# Altium PCB controller_V1.0.PcbDoc (part 6 of 8)
Units mm, origin at the board's own origin, x right, y up, seen from the top; angles counter-clockwise.
Board outline 284.13 x 175.13 mm, 4 copper layers (Top Layer, GND, VCC, Bottom Layer); 496 components, 415 nets, 1682 pads, 750 vias.
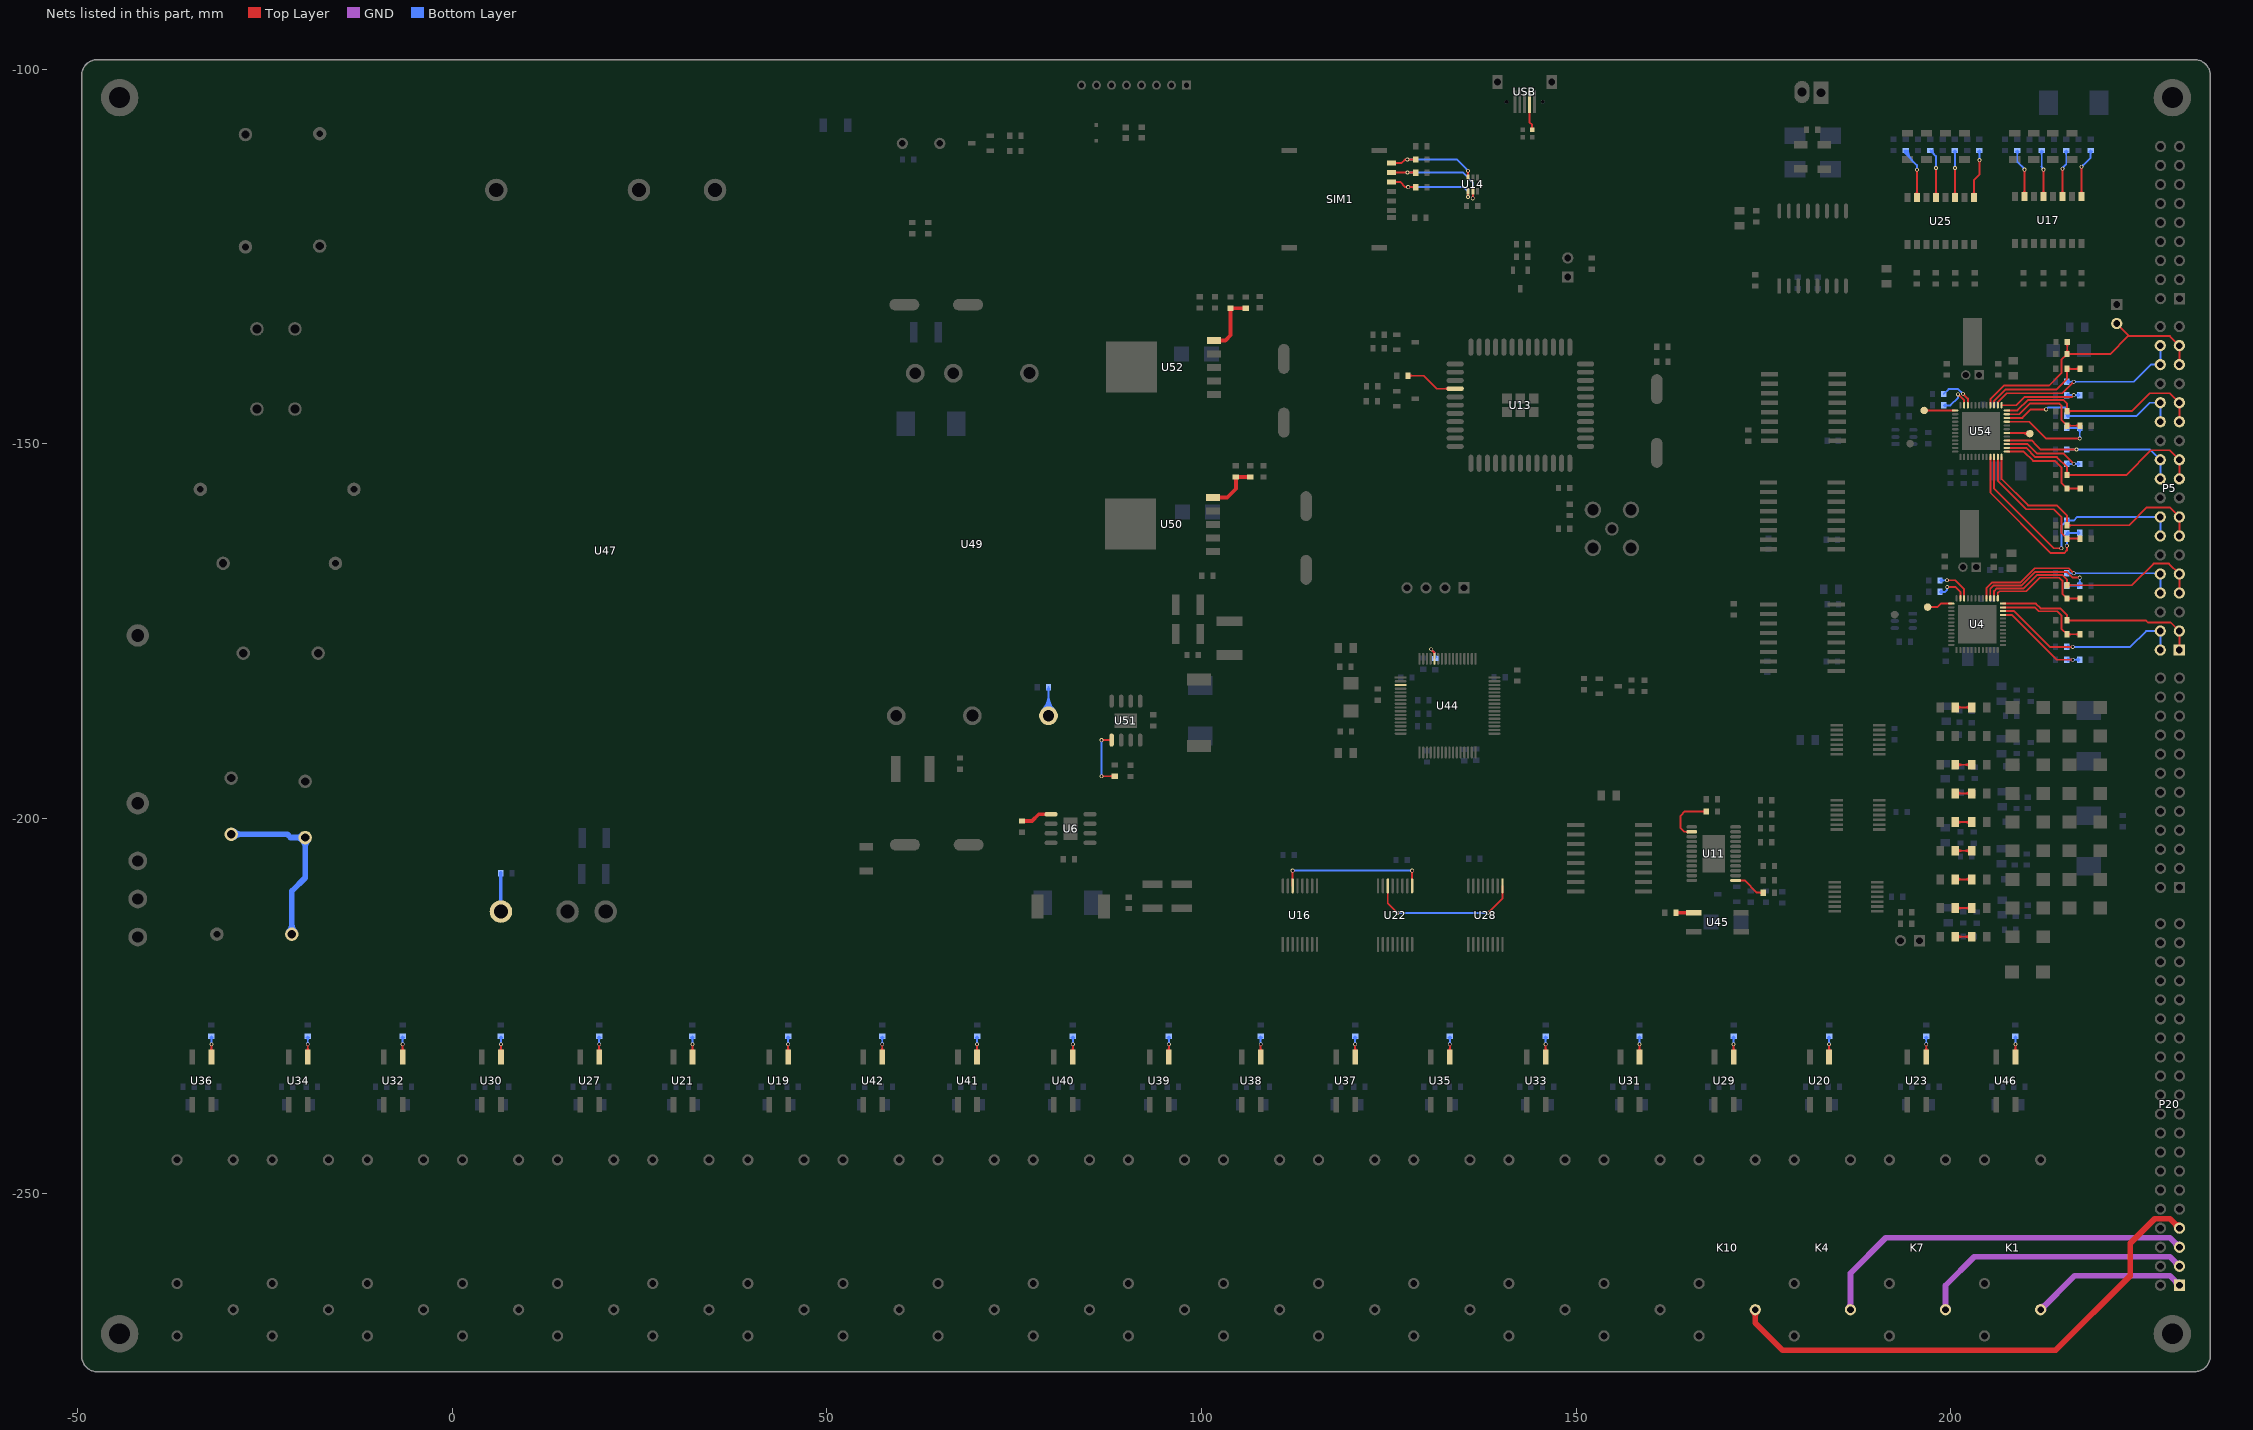
[diagram p8: the nets of this part, all layers, seen from the top]

## Via types
v1: diameter 0.508, hole 0.305, Top Layer to Bottom Layer, tented both sides, 596 vias
v2: diameter 1.016, hole 0.635, Top Layer to Bottom Layer, tented both sides, 65 vias
v3: diameter 0.6, hole 0.3, Top Layer to Bottom Layer, 50 vias
v4: diameter 0.762, hole 0.508, Top Layer to Bottom Layer, tented both sides, 29 vias
v5: diameter 2.032, hole 1.524, Top Layer to Bottom Layer, tented both sides, 4 vias
v6: diameter 3.048, hole 2.032, Top Layer to Bottom Layer, tented both sides, 3 vias
v7: diameter 1.5, hole 1, Top Layer to Bottom Layer, 2 vias
v8: diameter 2.54, hole 1.778, Top Layer to Bottom Layer, tented both sides, 1 vias

## Nets (pads, with @x,y where several pads share a name; then routed paths per layer and width w, separated by ;. In a path a pad name is that pad's centre, name@x,y a point inside that pad or via, vN(x,y) a via of type N, cw(c..) or ccw(c..) an arc to the next point about the centre after c; other vN are vias at no path point) (continued)
NetR10_1: R10.1 USB.2 | length 4.6
  Top Layer w0.254: USB.2@143.785,-104.326 143.785,-107.056 144.145,-107.417 R10.1@144.145,-108.093 ; R10.1@144.023,-107.971 ccw(c143.727,-107.675) 144.145,-107.675 ccw(c144.563,-107.675) R10.1@144.267,-107.971
NetR11_1: R11.1 R12.2 | length 5
  Top Layer w0.254: R12.2@200.625,-192.826 R11.1@202.816,-192.826 ; R12.2@200.889,-193.09 cw(c201.526,-193.727) 201.526,-192.826 cw(c201.526,-191.926) R12.2@200.889,-192.562 ; R11.1@202.553,-193.09 ccw(c201.916,-193.727) 201.916,-192.826 ccw(c201.916,-191.926) R11.1@202.553,-192.562
NetR13_1: R13.1 R14.2 | length 5
  Top Layer w0.254: R14.2@200.625,-196.652 R13.1@202.816,-196.652 ; R14.2@200.889,-196.916 cw(c201.526,-197.553) 201.526,-196.652 cw(c201.526,-195.752) R14.2@200.889,-196.388 ; R13.1@202.553,-196.916 ccw(c201.916,-197.553) 201.916,-196.652 ccw(c201.916,-195.752) R13.1@202.553,-196.388
NetR17_1: R17.1 R18.2 | length 5
  Top Layer w0.254: R18.2@200.625,-200.478 R17.1@202.816,-200.478 ; R18.2@200.889,-200.742 cw(c201.526,-201.378) 201.526,-200.478 cw(c201.526,-199.577) R18.2@200.889,-200.214 ; R17.1@202.553,-200.742 ccw(c201.916,-201.378) 201.916,-200.478 ccw(c201.916,-199.577) R17.1@202.553,-200.214
NetR20_2: R20.2 U4.10 | length 6.7
  Top Layer w0.254: v1(199.517,-168.199) 200.59,-168.199 201.795,-169.404 U4.10@201.795,-170.616 ; v1@199.607,-168.289 cw(c199.824,-168.505) 199.824,-168.199 cw(c199.824,-167.892) v1@199.607,-168.109
  Bottom Layer w0.254: R20.2@198.593,-168.199 v1(199.517,-168.199) ; R20.2@198.726,-168.382 cw(c199.168,-168.824) 199.168,-168.199 ; R20.2@198.726,-168.067 ccw(c199.045,-167.747) 199.045,-168.199 ; v1@199.427,-168.289 ccw(c199.21,-168.505) 199.21,-168.199 ccw(c199.21,-167.892) v1@199.427,-168.109
NetR22_1: R22.1 U44.60 | length 5.1
  Top Layer w0.254: v1@130.658,-177.546 cw(c130.658,-177.853) 130.874,-177.636 cw(c131.091,-177.419) v1@130.785,-177.419 ; v1(130.658,-177.419) 131.091,-177.852 U44.60@131.091,-178.678 ; 130.927,-177.689 cw(c130.588,-178.028) U44.60@131.068,-178.028
  Bottom Layer w0.254: v1@130.658,-177.546 cw(c130.658,-177.853) 130.874,-177.636 cw(c131.091,-177.419) v1@130.785,-177.419 ; v1(130.658,-177.419) 131.191,-177.952 R22.1@131.191,-178.638 ; R22.1@131.033,-178.481 ccw(c130.653,-178.1) 131.191,-178.1 ccw(c131.729,-178.1) R22.1@131.349,-178.481
NetR27_1: R27.1 R28.2 | length 5
  Top Layer w0.254: R28.2@200.625,-204.304 R27.1@202.816,-204.304 ; R28.2@200.889,-204.568 cw(c201.526,-205.204) 201.526,-204.304 cw(c201.526,-203.403) R28.2@200.889,-204.04 ; R27.1@202.553,-204.568 ccw(c201.916,-205.204) 201.916,-204.304 ccw(c201.916,-203.403) R27.1@202.553,-204.04
NetR31_1: R31.1 U47.4 | length 5.1
  Bottom Layer w0.508: R31.1@6.474,-207.289 6.474,-212.413 U47.4@6.485,-212.423
NetR32_1: R32.1 R33.2 | length 5
  Top Layer w0.254: R33.2@200.625,-208.13 R32.1@202.816,-208.13 ; R33.2@200.889,-208.393 cw(c201.526,-209.03) 201.526,-208.13 cw(c201.526,-207.229) R33.2@200.889,-207.866 ; R32.1@202.553,-208.393 ccw(c201.916,-209.03) 201.916,-208.13 ccw(c201.916,-207.229) R32.1@202.553,-207.866
NetR34_1: R34.1 R35.2 | length 5
  Top Layer w0.254: R35.2@200.625,-211.956 R34.1@202.816,-211.956 ; R35.2@200.889,-212.219 cw(c201.526,-212.856) 201.526,-211.956 cw(c201.526,-211.055) R35.2@200.889,-211.692 ; R34.1@202.553,-212.219 ccw(c201.916,-212.856) 201.916,-211.956 ccw(c201.916,-211.055) R34.1@202.553,-211.692
NetR36_1: R36.1 R38.2 | length 5
  Top Layer w0.254: R38.2@200.625,-215.781 R36.1@202.816,-215.781 ; R38.2@200.889,-216.045 cw(c201.526,-216.682) 201.526,-215.781 cw(c201.526,-214.881) R38.2@200.889,-215.518 ; R36.1@202.553,-216.045 ccw(c201.916,-216.682) 201.916,-215.781 ccw(c201.916,-214.881) R36.1@202.553,-215.518
NetR71_1: R71.1 U11.13 | length 5.6
  Top Layer w0.254: U11.13@171.299,-208.274 172.51,-208.274 174.142,-209.906 R71.1@174.978,-209.906 ; U11.13@171.868,-208.343 cw(c172.036,-208.51) 172.036,-208.274 cw(c172.036,-208.037) U11.13@171.868,-208.204 ; R71.1@174.82,-210.063 ccw(c174.44,-210.444) 174.44,-209.906 ccw(c174.44,-209.367) R71.1@174.82,-209.748
NetR73_2: R73.2 U4.11 | length 6.1
  Top Layer w0.254: v1(199.542,-169.113) 200.66,-169.113 201.295,-169.748 U4.11@201.295,-170.616 ; v1@199.632,-169.203 cw(c199.849,-169.42) 199.849,-169.113 cw(c199.849,-168.807) v1@199.632,-169.023
  Bottom Layer w0.254: R73.2@198.568,-169.748 199.263,-169.748 199.542,-169.469 v1(199.542,-169.113) ; R73.2@198.726,-169.906 cw(c199.106,-170.287) 199.106,-169.748 cw(c199.106,-169.21) R73.2@198.726,-169.591 ; v1@199.453,-169.203 cw(c199.236,-169.42) 199.542,-169.42 cw(c199.849,-169.42) v1@199.632,-169.203
NetR75_2: R75.2 U54.11 | length 6.5
  Top Layer w0.254: v1@200.99,-143.51 cw(c200.99,-143.817) 201.207,-143.6 cw(c201.424,-143.383) v1@201.117,-143.383 ; v1(200.99,-143.383) 201.803,-144.196 U54.11@201.803,-144.835
  Bottom Layer w0.254: R75.2@199.076,-144.856 199.974,-144.856 200.99,-143.84 v1(200.99,-143.383) v1@200.914,-143.383 ; R75.2@199.234,-145.014 cw(c199.614,-145.395) 199.614,-144.856 cw(c199.614,-144.318) R75.2@199.234,-144.699 ; v1@200.9,-143.473 cw(c200.684,-143.69) 200.99,-143.69 cw(c201.297,-143.69) v1@201.08,-143.473
NetR80_1: R80.1 R89.2 | length 5
  Top Layer w0.254: R89.2@200.625,-185.174 R80.1@202.816,-185.174 ; R89.2@200.889,-185.438 cw(c201.526,-186.075) 201.526,-185.174 cw(c201.526,-184.274) R89.2@200.889,-184.911 ; R80.1@202.553,-185.438 ccw(c201.916,-186.075) 201.916,-185.174 ccw(c201.916,-184.274) R80.1@202.553,-184.911
NetR81_1: R81.1 U25.1 | length 9.3
  Top Layer w0.254: U25.1@202.928,-116.701 ccw(c202.462,-116.235) 203.121,-116.235 ccw(c203.78,-116.235) U25.1@203.314,-116.701 ; U25.1@203.121,-117.094 203.121,-114.76 203.86,-114.021 v1(203.86,-112.116) ; v1@203.771,-112.205 cw(c203.554,-112.422) 203.86,-112.422 cw(c204.167,-112.422) v1@203.95,-112.205
  Bottom Layer w0.254: R81.1@203.677,-110.979 cw(c203.297,-111.36) 203.835,-111.36 cw(c204.373,-111.36) R81.1@203.993,-110.979 ; 203.835,-111.748 ccw(c204.228,-111.748) v1@203.95,-112.026 ; R81.1@203.835,-110.822 203.835,-112.09 v1(203.86,-112.116)
NetR86_1: R86.1 U25.3 | length 9.1
  Top Layer w0.254: U25.3@200.388,-116.701 ccw(c199.922,-116.235) 200.581,-116.235 ccw(c201.24,-116.235) U25.3@200.774,-116.701 ; v1@200.491,-113.244 cw(c200.275,-113.461) 200.581,-113.461 cw(c200.888,-113.461) v1@200.671,-113.244 ; U25.3@200.581,-117.094 v1(200.581,-113.154)
  Bottom Layer w0.254: R86.1@200.404,-110.979 cw(c200.024,-111.36) 200.562,-111.36 cw(c201.1,-111.36) R86.1@200.72,-110.979 ; v1@200.491,-113.065 ccw(c200.321,-112.894) 200.562,-112.894 ; 200.562,-112.801 ccw(c200.934,-112.801) v1@200.671,-113.065 ; R86.1@200.562,-110.822 200.562,-113.135 v1(200.581,-113.154)
NetR92_1: R92.1 U25.5 | length 9.4
  Top Layer w0.254: U25.5@197.848,-116.701 ccw(c197.382,-116.235) 198.041,-116.235 ccw(c198.7,-116.235) U25.5@198.234,-116.701 ; v1@197.951,-113.244 cw(c197.735,-113.461) 198.041,-113.461 cw(c198.348,-113.461) v1@198.131,-113.244 ; U25.5@198.041,-117.094 v1(198.041,-113.154)
  Bottom Layer w0.254: R92.1@197.289,-110.822 198.041,-111.574 v1(198.041,-113.154) ; R92.1@197.364,-111.045 cw(c197.364,-111.402) R92.1@197.617,-111.149 ; R92.1@197.587,-110.822 ccw(c198.306,-110.822) 197.798,-111.33 ; v1@197.951,-113.065 ccw(c197.735,-112.848) 198.041,-112.848 ccw(c198.348,-112.848) v1@198.131,-113.065
NetR96_1: R96.1 U25.7 | length 13
  Top Layer w0.254: U25.7@195.308,-116.701 ccw(c194.842,-116.235) 195.501,-116.235 ccw(c196.16,-116.235) U25.7@195.694,-116.701 ; v1@195.411,-113.498 cw(c195.195,-113.715) 195.501,-113.715 cw(c195.808,-113.715) v1@195.591,-113.498 ; U25.7@195.501,-117.094 v1(195.501,-113.408)
  Bottom Layer w0.254: R96.1@193.806,-110.822 ccw(c194.426,-110.822) 193.988,-111.26 ; R96.1@193.876,-110.995 cw(c193.639,-111.288) 194.016,-111.288 ; R96.1@193.933,-110.979 cw(c193.734,-111.179) 194.016,-111.179 ; 194.016,-111.294 cw(c194.317,-111.294) R96.1@194.187,-111.023 ; R96.1@194.016,-110.822 194.016,-111.288 ; R96.1@194.06,-110.822 ccw(c195.293,-110.822) 194.421,-111.693 ; R96.1@194.156,-110.995 ccw(c194.393,-111.288) 194.016,-111.288 ; R96.1@194.314,-110.822 ccw(c196.16,-110.822) 194.855,-112.127 ; v1@195.411,-113.319 ccw(c195.195,-113.102) 195.501,-113.102 ccw(c195.808,-113.102) v1@195.591,-113.319 ; v1(195.501,-113.408) 195.501,-112.773 194.016,-111.288
NetR105_1: R105.1 U11.2 | length 8.2
  Top Layer w0.254: U11.2@164.88,-201.843 ccw(c164.712,-202.01) 164.712,-201.774 ccw(c164.712,-201.537) U11.2@164.88,-201.704 ; U11.2@165.449,-201.774 164.436,-201.774 163.957,-201.295 163.957,-199.644 164.541,-199.06 R105.1@167.382,-199.06 ; R105.1@167.224,-199.217 ccw(c166.844,-199.598) 166.844,-199.06 ccw(c166.844,-198.521) R105.1@167.224,-198.902
NetR106_1: R106.1 U45.1 | length 2.4
  Top Layer w0.508: R106.1@163.347,-212.573 U45.1@165.707,-212.573
NetR107_1: R107.1 U46.1 | length 5.5
  Top Layer w0.254: U46.1@208.469,-231.037 ccw(c208.035,-230.603) 208.649,-230.603 ccw(c209.262,-230.603) U46.1@208.828,-231.037 ; v1@208.559,-230.214 cw(c208.342,-230.431) 208.649,-230.431 cw(c208.955,-230.431) v1@208.738,-230.214 ; U46.1@208.649,-231.851 v1(208.649,-230.124)
  Bottom Layer w0.254: R107.1@208.491,-229.24 cw(c208.11,-229.621) 208.649,-229.621 cw(c209.187,-229.621) R107.1@208.806,-229.24 ; v1@208.559,-230.034 ccw(c208.342,-229.817) 208.649,-229.817 ccw(c208.955,-229.817) v1@208.738,-230.034 ; v1(208.649,-230.124) R107.1@208.649,-229.083
NetR108_1: R108.1 U17.1 | length 9.5
  Top Layer w0.254: U17.1@217.279,-116.574 ccw(c216.813,-116.108) 217.472,-116.108 ccw(c218.131,-116.108) U17.1@217.665,-116.574 ; v1@217.382,-113.094 cw(c217.166,-113.311) 217.472,-113.311 cw(c217.779,-113.311) v1@217.562,-113.094 ; U17.1@217.472,-116.967 v1(217.472,-113.005)
  Bottom Layer w0.254: v1(217.472,-113.005) 218.694,-111.783 R108.1@218.694,-110.822 ; v1@217.472,-112.878 ccw(c217.472,-112.571) 217.689,-112.788 ccw(c217.906,-113.005) v1@217.599,-113.005 ; R108.1@218.536,-110.979 cw(c218.156,-111.36) 218.694,-111.36 cw(c219.232,-111.36) R108.1@218.852,-110.979
NetR111_1: R111.1 SIM1.2 U14.4 | length 17.3
  Top Layer w0.254: SIM1.2@125.346,-115.026 126.507,-115.026 127.203,-115.722 v1(127.584,-115.722) R111.1@128.596,-115.722 ; SIM1.2@125.776,-115.166 cw(c126.114,-115.504) 126.114,-115.026 cw(c126.114,-114.548) SIM1.2@125.776,-114.886 ; v1@127.494,-115.812 ccw(c127.278,-116.029) 127.278,-115.722 ccw(c127.278,-115.416) v1@127.494,-115.633 ; v1@127.674,-115.812 cw(c127.891,-116.029) 127.891,-115.722 cw(c127.891,-115.416) v1@127.674,-115.633 ; R111.1@128.439,-115.88 ccw(c128.058,-116.261) 128.058,-115.722 ccw(c128.058,-115.184) R111.1@128.439,-115.565 ; v1@135.478,-116.946 ccw(c135.261,-116.729) 135.568,-116.729 ccw(c135.874,-116.729) v1@135.657,-116.946 ; v1(135.568,-117.035) U14.4@135.568,-116.292
  Bottom Layer w0.254: v1(127.584,-115.722) 135.026,-115.722 135.568,-116.264 v1(135.568,-117.035) ; v1@127.674,-115.812 cw(c127.891,-116.029) 127.891,-115.722 cw(c127.891,-115.416) v1@127.674,-115.633 ; v1@135.478,-116.946 ccw(c135.261,-116.729) 135.568,-116.729 ccw(c135.874,-116.729) v1@135.657,-116.946
NetR113_1: R113.1 U17.3 | length 9.1
  Top Layer w0.254: U17.3@214.739,-116.574 ccw(c214.273,-116.108) 214.932,-116.108 ccw(c215.591,-116.108) U17.3@215.125,-116.574 ; v1@214.842,-113.348 cw(c214.626,-113.565) 214.932,-113.565 cw(c215.239,-113.565) v1@215.022,-113.348 ; U17.3@214.932,-116.967 v1(214.932,-113.259)
  Bottom Layer w0.254: v1@214.932,-113.132 215.428,-112.636 R113.1@215.428,-110.822 ; v1@215.059,-113.259 cw(c215.672,-113.259) 215.239,-112.825 ; R113.1@215.271,-110.979 cw(c214.89,-111.36) 215.428,-111.36 cw(c215.967,-111.36) R113.1@215.586,-110.979
NetR115_1: R115.1 U17.5 | length 8.9
  Top Layer w0.254: U17.5@212.199,-116.574 ccw(c211.733,-116.108) 212.392,-116.108 ccw(c213.051,-116.108) U17.5@212.585,-116.574 ; v1@212.302,-113.475 cw(c212.086,-113.692) 212.392,-113.692 cw(c212.699,-113.692) v1@212.482,-113.475 ; U17.5@212.392,-116.967 v1(212.392,-113.386)
  Bottom Layer w0.254: R115.1@212.005,-110.979 cw(c211.624,-111.36) 212.163,-111.36 cw(c212.701,-111.36) R115.1@212.32,-110.979 ; 212.099,-112.965 cw(c211.697,-113.367) v1@212.265,-113.382 ; R115.1@212.163,-110.822 212.163,-113.029 v1@212.392,-113.259
NetR117_1: R117.1 U17.7 | length 9.3
  Top Layer w0.254: U17.7@209.659,-116.574 ccw(c209.193,-116.108) 209.852,-116.108 ccw(c210.511,-116.108) U17.7@210.045,-116.574 ; v1@209.762,-113.475 cw(c209.546,-113.692) 209.852,-113.692 cw(c210.159,-113.692) v1@209.942,-113.475 ; U17.7@209.852,-116.967 v1(209.852,-113.386)
  Bottom Layer w0.254: R117.1@208.739,-110.979 cw(c208.358,-111.36) 208.897,-111.36 cw(c209.435,-111.36) R117.1@209.055,-110.979 ; R117.1@208.897,-110.822 208.897,-112.303 v1@209.852,-113.259 ; 209.546,-112.952 cw(c209.112,-113.386) v1@209.725,-113.386
NetR120_1: R120.1 SIM1.3 U14.3 | length 17.3
  Top Layer w0.254: SIM1.3@125.346,-112.486 126.731,-112.486 127.178,-112.039 ; SIM1.3@125.776,-112.626 cw(c126.114,-112.964) 126.114,-112.486 cw(c126.114,-112.008) SIM1.3@125.776,-112.346 ; 127.025,-112.192 cw(c127.248,-112.415) v1@127.415,-112.147 ; v1@127.392,-112.129 ccw(c127.178,-112.342) 127.178,-112.039 ; v1@127.392,-111.95 cw(c127.178,-111.737) 127.178,-112.039 ; v1@127.572,-112.129 cw(c127.789,-112.346) 127.789,-112.039 cw(c127.789,-111.733) v1@127.572,-111.95 ; R120.1@128.439,-112.197 ccw(c128.058,-112.578) 128.058,-112.039 ccw(c128.058,-111.501) R120.1@128.439,-111.882 ; R120.1@128.596,-112.039 v1(127.483,-112.039) 127.178,-112.039 ; v1@135.478,-113.62 cw(c135.261,-113.837) 135.568,-113.837 cw(c135.874,-113.837) v1@135.657,-113.62 ; U14.3@135.568,-114.442 v1(135.568,-113.53)
  Bottom Layer w0.254: v1(127.483,-112.039) 134.112,-112.039 v1@135.585,-113.513 ; v1@127.572,-112.129 cw(c127.789,-112.346) 127.789,-112.039 cw(c127.789,-111.733) v1@127.572,-111.95 ; 135.326,-113.253 cw(c135.049,-113.53) v1@135.441,-113.53
NetR121_1: R121.1 SIM1.7 U14.5 | length 19.5
  Top Layer w0.254: SIM1.7@125.346,-113.756 v1(127.508,-113.756) R121.1@128.535,-113.756 ; SIM1.7@125.776,-113.896 cw(c126.114,-114.234) 126.114,-113.756 cw(c126.114,-113.278) SIM1.7@125.776,-113.616 ; v1@127.418,-113.846 ccw(c127.201,-114.063) 127.201,-113.756 ccw(c127.201,-113.45) v1@127.418,-113.667 ; v1@127.598,-113.846 cw(c127.815,-114.063) 127.815,-113.756 cw(c127.815,-113.45) v1@127.598,-113.667 ; 128.024,-113.756 ccw(c128.024,-113.17) R121.1@128.439,-113.585 ; 128.092,-113.756 cw(c128.092,-114.247) R121.1@128.439,-113.9 ; v1@136.128,-117.134 ccw(c135.911,-116.917) 136.218,-116.917 ccw(c136.524,-116.917) v1@136.307,-117.134 ; v1(136.218,-117.224) U14.5@136.218,-116.292
  Bottom Layer w0.254: v1(127.508,-113.756) 134.178,-113.756 134.864,-113.756 136.218,-115.11 v1(136.218,-117.224) ; v1@127.598,-113.846 cw(c127.815,-114.063) 127.815,-113.756 cw(c127.815,-113.45) v1@127.598,-113.667 ; v1@136.128,-117.134 ccw(c135.911,-116.917) 136.218,-116.917 ccw(c136.524,-116.917) v1@136.307,-117.134
NetR124_1: R124.1 U19.1 | length 5.5
  Top Layer w0.254: U19.1@44.646,-231.037 ccw(c44.212,-230.603) 44.825,-230.603 ccw(c45.439,-230.603) U19.1@45.005,-231.037 ; v1@44.736,-230.214 cw(c44.519,-230.431) 44.825,-230.431 cw(c45.132,-230.431) v1@44.915,-230.214 ; U19.1@44.825,-231.851 v1(44.825,-230.124)
  Bottom Layer w0.254: R124.1@44.668,-229.24 cw(c44.287,-229.621) 44.825,-229.621 cw(c45.364,-229.621) R124.1@44.983,-229.24 ; v1@44.736,-230.034 ccw(c44.519,-229.817) 44.825,-229.817 ccw(c45.132,-229.817) v1@44.915,-230.034 ; v1(44.825,-230.124) R124.1@44.825,-229.083
NetR127_1: R127.1 U20.1 | length 5.5
  Top Layer w0.254: U20.1@183.599,-231.037 ccw(c183.166,-230.603) 183.779,-230.603 ccw(c184.392,-230.603) U20.1@183.958,-231.037 ; v1@183.689,-230.214 cw(c183.472,-230.431) 183.779,-230.431 cw(c184.085,-230.431) v1@183.869,-230.214 ; U20.1@183.779,-231.851 v1(183.779,-230.124)
  Bottom Layer w0.254: R127.1@183.621,-229.24 cw(c183.24,-229.621) 183.779,-229.621 cw(c184.317,-229.621) R127.1@183.936,-229.24 ; v1@183.689,-230.034 ccw(c183.472,-229.817) 183.779,-229.817 ccw(c184.085,-229.817) v1@183.869,-230.034 ; v1(183.779,-230.124) R127.1@183.779,-229.083
NetR128_1: R128.1 U21.1 | length 5.5
  Top Layer w0.254: U21.1@31.881,-231.037 ccw(c31.447,-230.603) 32.061,-230.603 ccw(c32.674,-230.603) U21.1@32.24,-231.037 ; v1@31.971,-230.214 cw(c31.754,-230.431) 32.061,-230.431 cw(c32.367,-230.431) v1@32.15,-230.214 ; U21.1@32.061,-231.851 v1(32.061,-230.124)
  Bottom Layer w0.254: R128.1@31.872,-229.24 cw(c31.416,-229.696) 32.061,-229.696 ; v1@31.971,-230.034 ccw(c31.754,-229.817) 32.061,-229.817 ccw(c32.367,-229.817) v1@32.15,-230.034 ; v1(32.061,-230.124) R128.1@32.061,-229.083 ; 32.061,-229.546 cw(c32.493,-229.546) R128.1@32.187,-229.24
NetR131_1: R131.1 U23.1 | length 5.5
  Top Layer w0.254: U23.1@196.566,-231.037 ccw(c196.132,-230.603) 196.745,-230.603 ccw(c197.359,-230.603) U23.1@196.925,-231.037 ; v1@196.656,-230.214 cw(c196.439,-230.431) 196.745,-230.431 cw(c197.052,-230.431) v1@196.835,-230.214 ; U23.1@196.745,-231.851 v1(196.745,-230.124)
  Bottom Layer w0.254: R131.1@196.588,-229.24 cw(c196.207,-229.621) 196.745,-229.621 cw(c197.284,-229.621) R131.1@196.903,-229.24 ; v1@196.656,-230.034 ccw(c196.439,-229.817) 196.745,-229.817 ccw(c197.052,-229.817) v1@196.835,-230.034 ; v1(196.745,-230.124) R131.1@196.745,-229.083
NetR132_1: R132.1 U27.1 | length 5.5
  Top Layer w0.254: U27.1@19.423,-231.037 ccw(c18.989,-230.603) 19.603,-230.603 ccw(c20.216,-230.603) U27.1@19.782,-231.037 ; v1@19.513,-230.214 cw(c19.296,-230.431) 19.603,-230.431 cw(c19.909,-230.431) v1@19.692,-230.214 ; U27.1@19.603,-231.851 v1(19.603,-230.124)
  Bottom Layer w0.254: R132.1@19.445,-229.24 cw(c19.064,-229.621) 19.603,-229.621 cw(c20.141,-229.621) R132.1@19.76,-229.24 ; v1@19.513,-230.034 ccw(c19.296,-229.817) 19.603,-229.817 ccw(c19.909,-229.817) v1@19.692,-230.034 ; v1(19.603,-230.124) R132.1@19.603,-229.083
NetR135_1: R135.1 U29.1 | length 5.5
  Top Layer w0.254: U29.1@170.852,-231.037 ccw(c170.418,-230.603) 171.031,-230.603 ccw(c171.644,-230.603) U29.1@171.211,-231.037 ; v1@170.941,-230.214 cw(c170.725,-230.431) 171.031,-230.431 cw(c171.338,-230.431) v1@171.121,-230.214 ; U29.1@171.031,-231.851 v1(171.031,-230.124)
  Bottom Layer w0.254: R135.1@170.874,-229.24 cw(c170.493,-229.621) 171.031,-229.621 cw(c171.57,-229.621) R135.1@171.189,-229.24 ; v1@170.941,-230.034 ccw(c170.725,-229.817) 171.031,-229.817 ccw(c171.338,-229.817) v1@171.121,-230.034 ; v1(171.031,-230.124) R135.1@171.031,-229.083
NetR136_1: R136.1 U30.1 | length 5.5
  Top Layer w0.254: U30.1@6.304,-231.037 ccw(c5.871,-230.603) 6.484,-230.603 ccw(c7.097,-230.603) U30.1@6.664,-231.037 ; v1@6.394,-230.214 cw(c6.177,-230.431) 6.484,-230.431 cw(c6.791,-230.431) v1@6.574,-230.214 ; U30.1@6.484,-231.851 v1(6.484,-230.124)
  Bottom Layer w0.254: R136.1@6.326,-229.24 cw(c5.946,-229.621) 6.484,-229.621 cw(c7.022,-229.621) R136.1@6.642,-229.24 ; v1@6.394,-230.034 ccw(c6.177,-229.817) 6.484,-229.817 ccw(c6.791,-229.817) v1@6.574,-230.034 ; v1(6.484,-230.124) R136.1@6.484,-229.083
NetR139_1: R139.1 U31.1 | length 5.5
  Top Layer w0.254: U31.1@158.29,-231.037 ccw(c157.856,-230.603) 158.47,-230.603 ccw(c159.083,-230.603) U31.1@158.649,-231.037 ; v1@158.38,-230.214 cw(c158.163,-230.431) 158.47,-230.431 cw(c158.776,-230.431) v1@158.559,-230.214 ; U31.1@158.47,-231.851 v1(158.47,-230.124)
  Bottom Layer w0.254: R139.1@158.312,-229.24 cw(c157.931,-229.621) 158.47,-229.621 cw(c159.008,-229.621) R139.1@158.627,-229.24 ; v1@158.38,-230.034 ccw(c158.163,-229.817) 158.47,-229.817 ccw(c158.776,-229.817) v1@158.559,-230.034 ; v1(158.47,-230.124) R139.1@158.47,-229.083
NetR140_1: R140.1 U32.1 | length 5.5
  Top Layer w0.254: U32.1@-6.812,-231.037 ccw(c-7.246,-230.603) -6.632,-230.603 ccw(c-6.019,-230.603) U32.1@-6.453,-231.037 ; v1@-6.722,-230.214 cw(c-6.939,-230.431) -6.632,-230.431 cw(c-6.326,-230.431) v1@-6.543,-230.214 ; U32.1@-6.632,-231.851 v1(-6.632,-230.124)
  Bottom Layer w0.254: R140.1@-6.79,-229.24 cw(c-7.171,-229.621) -6.632,-229.621 cw(c-6.094,-229.621) R140.1@-6.475,-229.24 ; v1@-6.722,-230.034 ccw(c-6.939,-229.817) -6.632,-229.817 ccw(c-6.326,-229.817) v1@-6.543,-230.034 ; v1(-6.632,-230.124) R140.1@-6.632,-229.083
NetR142_1: R142.1 U33.1 | length 5.5
  Top Layer w0.254: U33.1@145.761,-231.037 ccw(c145.327,-230.603) 145.941,-230.603 ccw(c146.554,-230.603) U33.1@146.12,-231.037 ; v1@145.851,-230.214 cw(c145.634,-230.431) 145.941,-230.431 cw(c146.247,-230.431) v1@146.03,-230.214 ; U33.1@145.941,-231.851 v1(145.941,-230.124)
  Bottom Layer w0.254: R142.1@145.783,-229.24 cw(c145.402,-229.621) 145.941,-229.621 cw(c146.479,-229.621) R142.1@146.098,-229.24 ; v1@145.851,-230.034 ccw(c145.634,-229.817) 145.941,-229.817 ccw(c146.247,-229.817) v1@146.03,-230.034 ; v1(145.941,-230.124) R142.1@145.941,-229.083
NetR144_1: R144.1 U34.1 | length 5.5
  Top Layer w0.254: U34.1@-19.475,-231.037 ccw(c-19.909,-230.603) -19.296,-230.603 ccw(c-18.682,-230.603) U34.1@-19.116,-231.037 ; v1@-19.385,-230.214 cw(c-19.602,-230.431) -19.296,-230.431 cw(c-18.989,-230.431) v1@-19.206,-230.214 ; U34.1@-19.296,-231.851 v1(-19.296,-230.124)
  Bottom Layer w0.254: R144.1@-19.453,-229.24 cw(c-19.834,-229.621) -19.296,-229.621 cw(c-18.757,-229.621) R144.1@-19.138,-229.24 ; v1@-19.385,-230.034 ccw(c-19.602,-229.817) -19.296,-229.817 ccw(c-18.989,-229.817) v1@-19.206,-230.034 ; v1(-19.296,-230.124) R144.1@-19.296,-229.083
NetR147_1: R147.1 U35.1 | length 5.5
  Top Layer w0.254: U35.1@132.968,-231.037 ccw(c132.534,-230.603) 133.147,-230.603 ccw(c133.76,-230.603) U35.1@133.327,-231.037 ; v1@133.057,-230.214 cw(c132.841,-230.431) 133.147,-230.431 cw(c133.454,-230.431) v1@133.237,-230.214 ; U35.1@133.147,-231.851 v1(133.147,-230.124)
  Bottom Layer w0.254: R147.1@132.989,-229.24 cw(c132.609,-229.621) 133.147,-229.621 cw(c133.686,-229.621) R147.1@133.305,-229.24 ; v1@133.057,-230.034 ccw(c132.841,-229.817) 133.147,-229.817 ccw(c133.454,-229.817) v1@133.237,-230.034 ; v1(133.147,-230.124) R147.1@133.147,-229.083
NetR148_1: R148.1 U36.1 | length 5.5
  Top Layer w0.254: U36.1@-32.339,-231.037 ccw(c-32.772,-230.603) -32.159,-230.603 ccw(c-31.546,-230.603) U36.1@-31.979,-231.037 ; v1@-32.249,-230.214 cw(c-32.466,-230.431) -32.159,-230.431 cw(c-31.852,-230.431) v1@-32.069,-230.214 ; U36.1@-32.159,-231.851 v1(-32.159,-230.124)
  Bottom Layer w0.254: R148.1@-32.317,-229.24 cw(c-32.697,-229.621) -32.159,-229.621 cw(c-31.621,-229.621) R148.1@-32.001,-229.24 ; v1@-32.249,-230.034 ccw(c-32.466,-229.817) -32.159,-229.817 ccw(c-31.852,-229.817) v1@-32.069,-230.034 ; v1(-32.159,-230.124) R148.1@-32.159,-229.083
NetR150_1: R150.1 U37.1 | length 5.5
  Top Layer w0.254: U37.1@120.332,-231.037 ccw(c119.898,-230.603) 120.511,-230.603 ccw(c121.125,-230.603) U37.1@120.691,-231.037 ; v1@120.422,-230.214 cw(c120.205,-230.431) 120.511,-230.431 cw(c120.818,-230.431) v1@120.601,-230.214 ; U37.1@120.511,-231.851 v1(120.511,-230.124)
  Bottom Layer w0.254: R150.1@120.354,-229.24 cw(c119.973,-229.621) 120.511,-229.621 cw(c121.05,-229.621) R150.1@120.669,-229.24 ; v1@120.422,-230.034 ccw(c120.205,-229.817) 120.511,-229.817 ccw(c120.818,-229.817) v1@120.601,-230.034 ; v1(120.511,-230.124) R150.1@120.511,-229.083
NetR152_1: R152.1 U38.1 | length 5.5
  Top Layer w0.254: U38.1@107.721,-231.037 ccw(c107.288,-230.603) 107.901,-230.603 ccw(c108.514,-230.603) U38.1@108.081,-231.037 ; v1@107.811,-230.214 cw(c107.594,-230.431) 107.901,-230.431 cw(c108.208,-230.431) v1@107.991,-230.214 ; U38.1@107.901,-231.851 v1(107.901,-230.124)
  Bottom Layer w0.254: R152.1@107.743,-229.24 cw(c107.363,-229.621) 107.901,-229.621 cw(c108.439,-229.621) R152.1@108.059,-229.24 ; v1@107.811,-230.034 ccw(c107.594,-229.817) 107.901,-229.817 ccw(c108.208,-229.817) v1@107.991,-230.034 ; v1(107.901,-230.124) R152.1@107.901,-229.083
NetR154_1: R154.1 U39.1 | length 5.5
  Top Layer w0.254: U39.1@95.466,-231.037 ccw(c95.033,-230.603) 95.646,-230.603 ccw(c96.259,-230.603) U39.1@95.826,-231.037 ; v1@95.556,-230.214 cw(c95.339,-230.431) 95.646,-230.431 cw(c95.953,-230.431) v1@95.736,-230.214 ; U39.1@95.646,-231.851 v1(95.646,-230.124)
  Bottom Layer w0.254: R154.1@95.488,-229.24 cw(c95.108,-229.621) 95.646,-229.621 cw(c96.184,-229.621) R154.1@95.804,-229.24 ; v1@95.556,-230.034 ccw(c95.339,-229.817) 95.646,-229.817 ccw(c95.953,-229.817) v1@95.736,-230.034 ; v1(95.646,-230.124) R154.1@95.646,-229.083
NetR156_1: R156.1 U40.1 | length 5.5
  Top Layer w0.254: U40.1@82.653,-231.037 ccw(c82.219,-230.603) 82.832,-230.603 ccw(c83.446,-230.603) U40.1@83.012,-231.037 ; v1@82.743,-230.214 cw(c82.526,-230.431) 82.832,-230.431 cw(c83.139,-230.431) v1@82.922,-230.214 ; U40.1@82.832,-231.851 v1(82.832,-230.124)
  Bottom Layer w0.254: R156.1@82.675,-229.24 cw(c82.294,-229.621) 82.832,-229.621 cw(c83.371,-229.621) R156.1@82.99,-229.24 ; v1@82.743,-230.034 ccw(c82.526,-229.817) 82.832,-229.817 ccw(c83.139,-229.817) v1@82.922,-230.034 ; v1(82.832,-230.124) R156.1@82.832,-229.083
NetR158_1: R158.1 U41.1 | length 5.5
  Top Layer w0.254: U41.1@69.865,-231.037 ccw(c69.431,-230.603) 70.044,-230.603 ccw(c70.657,-230.603) U41.1@70.224,-231.037 ; v1@69.954,-230.214 cw(c69.738,-230.431) 70.044,-230.431 cw(c70.351,-230.431) v1@70.134,-230.214 ; U41.1@70.044,-231.851 v1(70.044,-230.124)
  Bottom Layer w0.254: R158.1@69.887,-229.24 cw(c69.506,-229.621) 70.044,-229.621 cw(c70.583,-229.621) R158.1@70.202,-229.24 ; v1@69.954,-230.034 ccw(c69.738,-229.817) 70.044,-229.817 ccw(c70.351,-229.817) v1@70.134,-230.034 ; v1(70.044,-230.124) R158.1@70.044,-229.083
NetR160_1: R160.1 U42.1 | length 5.5
  Top Layer w0.254: U42.1@57.203,-231.037 ccw(c56.77,-230.603) 57.383,-230.603 ccw(c57.996,-230.603) U42.1@57.563,-231.037 ; v1@57.293,-230.214 cw(c57.076,-230.431) 57.383,-230.431 cw(c57.69,-230.431) v1@57.473,-230.214 ; U42.1@57.383,-231.851 v1(57.383,-230.124)
  Bottom Layer w0.254: R160.1@57.225,-229.24 cw(c56.845,-229.621) 57.383,-229.621 cw(c57.921,-229.621) R160.1@57.541,-229.24 ; v1@57.293,-230.034 ccw(c57.076,-229.817) 57.383,-229.817 ccw(c57.69,-229.817) v1@57.473,-230.034 ; v1(57.383,-230.124) R160.1@57.383,-229.083
NetR164_1: R164.1 U13.16 | length 8.6
  Top Layer w0.254: R164.1@127.582,-140.894 129.667,-140.894 131.404,-142.631 U13.16@133.868,-142.631 ; R164.1@127.739,-141.051 cw(c128.12,-141.432) 128.12,-140.894 cw(c128.12,-140.355) R164.1@127.739,-140.736 ; U13.16@132.903,-142.771 ccw(c132.565,-143.109) 132.565,-142.631 ccw(c132.565,-142.153) U13.16@132.903,-142.491
NetR173_1: R173.1 R176.2 R177.2 | length 31.6
  Bottom Layer w0.762: R173.1@-29.517,-202.108 -22.047,-202.108 -21.608,-202.547 R176.2@-19.637,-202.547 -19.637,-207.902 -21.422,-209.687 R177.2@-21.422,-215.443 ; R173.1@-29.15,-202.475 cw(c-28.264,-203.361) -28.264,-202.108 cw(c-28.264,-200.855) R173.1@-29.15,-201.741 ; R177.2@-21.789,-215.076 ccw(c-22.675,-214.19) -21.422,-214.19 ccw(c-20.169,-214.19) R177.2@-21.055,-215.076 ; R176.2@-20.004,-202.18 cw(c-20.89,-201.294) -20.89,-202.547 cw(c-20.89,-203.8) -20.004,-202.914 cw(c-20.89,-203.8) -19.637,-203.8 cw(c-18.384,-203.8) R176.2@-19.27,-202.914
NetR178_1: R178.1 U49.6 | length 14.5
  Bottom Layer w0.254: U49.6@78.782,-185.49 ccw(c76.864,-183.572) 79.576,-183.572 ccw(c82.287,-183.572) U49.6@80.37,-185.49 ; U49.6@78.961,-185.669 ccw(c77.478,-184.186) 79.576,-184.186 ccw(c81.674,-184.186) U49.6@80.19,-185.669 ; U49.6@79.141,-185.849 ccw(c78.091,-184.799) 79.576,-184.799 ccw(c81.06,-184.799) U49.6@80.01,-185.849 ; R178.1@79.418,-182.706 cw(c79.037,-183.087) 79.576,-183.087 cw(c80.114,-183.087) R178.1@79.733,-182.706 ; U49.6@79.576,-186.284 R178.1@79.576,-182.474
NetR179_1: R179.1 U6.5 | length 4.2
  Top Layer w0.508: R179.1@76.045,-200.33 77.391,-200.33 78.28,-199.441 U6.5@79.922,-199.441
NetR180_2: R180.2 R181.2 U50.5 | length 7.9
  Top Layer w0.508: U50.5@101.521,-157.138 103.438,-157.138 104.595,-155.981 R181.2@104.595,-154.407 R180.2@106.5,-154.407 ; U50.5@102.127,-157.294 cw(c102.505,-157.672) 102.505,-157.138 cw(c102.505,-156.604) U50.5@102.127,-156.982
NetR182_1: R182.1 U51.5 | length 11.4
  Top Layer w0.254: v1(86.668,-189.538) U51.5@88.008,-189.538 ; v1@86.672,-194.361 R182.1@88.434,-194.361 ; v1@86.758,-194.447 cw(c86.967,-194.656) 86.967,-194.361 ; v1@86.758,-194.268 ccw(c86.983,-194.043) 86.983,-194.361 ; v1@86.758,-189.628 cw(c86.975,-189.845) 86.975,-189.538 cw(c86.975,-189.232) v1@86.758,-189.448 ; U51.5@87.886,-189.661 ccw(c87.591,-189.956) 87.591,-189.538 ccw(c87.591,-189.121) U51.5@87.886,-189.416 ; R182.1@88.202,-194.518 ccw(c87.821,-194.899) 87.821,-194.361 ccw(c87.821,-193.822) R182.1@88.202,-194.203
  Bottom Layer w0.254: v1@86.578,-194.268 ccw(c86.362,-194.051) 86.668,-194.051 ccw(c86.975,-194.051) v1@86.758,-194.268 ; v1@86.578,-189.628 cw(c86.362,-189.845) 86.668,-189.845 cw(c86.975,-189.845) v1@86.758,-189.628 ; v1(86.668,-194.357) v1(86.668,-189.538)
NetR185_2: R185.2 R186.2 U52.5 | length 9
  Top Layer w0.508: U52.5@101.648,-136.183 103.184,-136.183 103.867,-135.5 R186.2@103.867,-131.878 105.89,-131.878 R185.2@105.915,-131.904 ; U52.5@102.254,-136.339 cw(c102.632,-136.717) 102.632,-136.183 cw(c102.632,-135.649) U52.5@102.254,-136.027
NetR190_2: R190.2 U54.10 | length 5.9
  Top Layer w0.254: v1@201.651,-143.434 cw(c201.651,-143.74) 201.867,-143.524 cw(c202.084,-143.307) v1@201.778,-143.307 ; v1(201.651,-143.307) 202.303,-143.959 U54.10@202.303,-144.835
  Bottom Layer w0.254: R190.2@199.076,-143.332 199.736,-142.672 201.016,-142.672 v1(201.651,-143.307) ; v1@201.524,-143.307 ccw(c201.217,-143.307) 201.434,-143.09 ccw(c201.651,-142.873) v1@201.651,-143.18
NetTP3_1: TP3.1 U54.42 | length 4.5
  Top Layer w0.254: U54.42@207.503,-148.535 210.509,-148.535 TP3.1@210.589,-148.615 ; 209.495,-148.535 cw(c209.495,-149.71) TP3.1@210.325,-148.879 ; 209.882,-148.535 ccw(c209.882,-147.909) TP3.1@210.325,-148.352
NetTP8_1: TP8.1 U54.13 | length 4.3
  Top Layer w0.254: TP8.1@196.367,-145.644 TP8.1@196.476,-145.535 U54.13@200.603,-145.535
NetTP18_1: TP18.1 U4.13 | length 3.3
  Top Layer w0.254: TP18.1@196.941,-171.78 198.222,-171.78 198.686,-171.316 U4.13@200.095,-171.316
NetU16_14: U16.14 U22.9 | length 21.9
  Top Layer w0.254: v1@112.079,-207.048 cw(c111.862,-207.265) 112.168,-207.265 cw(c112.475,-207.265) v1@112.258,-207.048 ; U16.14@112.168,-208.989 v1(112.168,-206.958) ; v1@128.029,-207.048 cw(c127.812,-207.265) 128.118,-207.265 cw(c128.425,-207.265) v1@128.208,-207.048 ; U22.9@128.118,-208.989 v1(128.118,-206.958)
  Bottom Layer w0.254: v1(112.168,-206.958) v1(128.118,-206.958) ; v1@112.258,-207.048 cw(c112.475,-207.265) 112.475,-206.958 cw(c112.475,-206.652) v1@112.258,-206.869 ; v1@128.029,-207.048 ccw(c127.812,-207.265) 127.812,-206.958 ccw(c127.812,-206.652) v1@128.029,-206.869
NetU22_14: U22.14 U28.9 | length 22.6
  Top Layer w0.254: U22.14@124.868,-208.989 124.868,-211.305 v1(126.162,-212.598) ; v1@126.035,-212.598 ccw(c125.728,-212.598) 125.945,-212.381 ccw(c126.162,-212.164) v1@126.162,-212.471 ; v1(138.252,-212.598) 140.183,-210.667 U28.9@140.183,-208.989 ; v1@138.252,-212.471 ccw(c138.252,-212.164) 138.469,-212.381 ccw(c138.686,-212.598) v1@138.379,-212.598
  Bottom Layer w0.254: v1(126.162,-212.598) v1(138.252,-212.598) ; v1@126.252,-212.688 cw(c126.468,-212.905) 126.468,-212.598 cw(c126.468,-212.291) v1@126.252,-212.508 ; v1@138.162,-212.688 ccw(c137.946,-212.905) 137.946,-212.598 ccw(c137.946,-212.291) v1@138.162,-212.508
PT100_A1: R192.1 R199.2 U54.3 | length 17.1
  Top Layer w0.254: U54.3@205.803,-144.835 205.803,-144.26 207.34,-142.723 214.147,-142.723 215.542,-141.328 R192.1@215.542,-139.979 R199.2@217.268,-139.979 ; R192.1@215.384,-140.212 cw(c215.003,-140.593) 215.542,-140.593 cw(c216.08,-140.593) R192.1@215.699,-140.212 ; R192.1@215.699,-140.137 cw(c216.08,-140.518) 216.08,-139.979 cw(c216.08,-139.441) R192.1@215.699,-139.822 ; R199.2@217.11,-140.137 ccw(c216.729,-140.518) 216.729,-139.979 ccw(c216.729,-139.441) R199.2@217.11,-139.822
PT100_A2: R204.1 R211.2 U54.47 | length 14.4
  Top Layer w0.254: U54.47@207.503,-146.035 209.184,-146.035 210.591,-144.628 214.528,-144.628 214.811,-144.91 214.811,-146.843 R204.1@215.542,-147.574 R211.2@217.268,-147.574 ; R204.1@215.699,-147.732 cw(c216.08,-148.112) 216.08,-147.574 cw(c216.08,-147.036) R204.1@215.699,-147.416 ; R211.2@217.11,-147.732 ccw(c216.729,-148.112) 216.729,-147.574 ccw(c216.729,-147.036) R211.2@217.11,-147.416
PT100_A3: R216.1 R223.2 U54.39 | length 14.9
  Top Layer w0.254: U54.39@207.503,-150.035 210.284,-150.035 210.972,-150.724 211.506,-151.257 215.036,-151.257 v1(216.433,-152.654) ; v1@216.306,-152.654 ccw(c216,-152.654) 216.217,-152.437 ccw(c216.433,-152.22) v1@216.433,-152.527
  Bottom Layer w0.254: R216.1@215.515,-152.654 v1(216.433,-152.654) R223.2@217.217,-152.654 ; R216.1@215.673,-152.812 cw(c216.053,-153.192) 216.053,-152.654 cw(c216.053,-152.116) R216.1@215.673,-152.496 ; v1@216.344,-152.744 ccw(c216.127,-152.961) 216.127,-152.654 ccw(c216.127,-152.347) v1@216.344,-152.564 ; v1@216.523,-152.744 cw(c216.74,-152.961) 216.74,-152.654 cw(c216.74,-152.347) v1@216.523,-152.564 ; v1@216.643,-152.654 cw(c216.643,-153.279) R223.2@217.085,-152.837 ; 216.765,-152.654 ccw(c216.765,-152.202) R223.2@217.085,-152.522
PT100_A4: R194.1 R200.2 U54.35 | length 20.3
  Top Layer w0.254: U54.35@206.303,-151.735 206.303,-154.944 210.083,-158.725 211.988,-158.725 213.766,-158.725 214.782,-159.741 214.782,-161.877 R194.1@215.542,-162.636 R200.2@217.268,-162.636 ; R194.1@215.699,-162.794 cw(c216.08,-163.175) 216.08,-162.636 cw(c216.08,-162.098) R194.1@215.699,-162.479 ; R200.2@217.11,-162.794 ccw(c216.729,-163.175) 216.729,-162.636 ccw(c216.729,-162.098) R200.2@217.11,-162.479
PT100_A5: R206.1 R212.2 U4.1 | length 16.4
  Top Layer w0.254: U4.1@206.295,-170.616 206.295,-169.894 206.527,-169.662 210.099,-169.662 211.892,-167.869 214.528,-167.869 214.909,-168.25 214.909,-170.005 R206.1@215.542,-170.637 R212.2@217.268,-170.637 ; R206.1@215.699,-170.795 cw(c216.08,-171.176) 216.08,-170.637 cw(c216.08,-170.099) R206.1@215.699,-170.48 ; R212.2@217.11,-170.795 ccw(c216.729,-171.176) 216.729,-170.637 ccw(c216.729,-170.099) R212.2@217.11,-170.48
PT100_A6: R218.1 R224.2 U4.47 | length 14.5
  Top Layer w0.254: U4.47@206.995,-171.816 211.212,-171.816 211.734,-172.339 214.249,-172.339 214.782,-172.872 214.782,-174.653 R218.1@215.542,-175.412 R224.2@217.268,-175.412 ; R218.1@215.699,-175.57 cw(c216.08,-175.951) 216.08,-175.412 cw(c216.08,-174.874) R218.1@215.699,-175.255 ; R224.2@217.11,-175.57 ccw(c216.729,-175.951) 216.729,-175.412 ccw(c216.729,-174.874) R224.2@217.11,-175.255
PT100_A8: R196.1 R201.2 U54.1 | length 14.6
  Top Layer w0.254: U54.1@206.803,-144.835 208.758,-144.835 209.855,-143.739 216.179,-143.739 v1(216.433,-143.485)
  Bottom Layer w0.254: R196.1@215.515,-143.485 v1(216.433,-143.485) R201.2@217.242,-143.485 ; R196.1@215.673,-143.642 cw(c216.053,-144.023) 216.053,-143.485 cw(c216.053,-142.946) R196.1@215.673,-143.327 ; v1@216.344,-143.574 ccw(c216.127,-143.791) 216.127,-143.485 ccw(c216.127,-143.178) v1@216.344,-143.395 ; v1@216.523,-143.574 cw(c216.74,-143.791) 216.74,-143.485 cw(c216.74,-143.178) v1@216.523,-143.395 ; R201.2@217.085,-143.642 ccw(c216.704,-144.023) 216.704,-143.485 ccw(c216.704,-142.946) R201.2@217.085,-143.327
PT100_A9: R208.1 R213.2 U54.45 | length 17.8
  Top Layer w0.254: U54.45@207.503,-147.035 209.062,-147.035 209.067,-147.041 ; 208.559,-147.041 209.067,-147.041 ; v1@217.152,-149.37 ccw(c216.936,-149.586) 216.936,-149.28 ccw(c216.936,-148.973) v1@217.152,-149.19 ; v1(217.242,-149.28) 212.747,-149.28 210.508,-147.041 209.067,-147.041
  Bottom Layer w0.254: R208.1@215.515,-147.879 R213.2@217.242,-147.879 v1(217.242,-149.28) ; R208.1@215.673,-148.036 cw(c216.053,-148.417) 216.053,-147.879 cw(c216.053,-147.34) R208.1@215.673,-147.721 ; R213.2@217.085,-148.111 cw(c216.704,-148.492) 217.242,-148.492 cw(c217.781,-148.492) R213.2@217.4,-148.111 ; R213.2@217.085,-148.036 ccw(c216.704,-148.417) 216.704,-147.879 ccw(c216.704,-147.34) R213.2@217.085,-147.721 ; v1@217.152,-149.19 ccw(c216.936,-148.973) 217.242,-148.973 ccw(c217.549,-148.973) v1@217.332,-149.19
PT100_A10: R220.1 R225.2 U54.37 | length 14.7
  Top Layer w0.254: U54.37@207.503,-151.035 209.76,-151.035 210.998,-152.273 213.919,-152.273 214.811,-153.165 214.811,-155.225 R220.1@215.542,-155.956 R225.2@217.293,-155.956 ; R220.1@215.699,-156.114 cw(c216.08,-156.494) 216.08,-155.956 cw(c216.08,-155.418) R220.1@215.699,-155.798 ; R225.2@217.135,-156.114 ccw(c216.755,-156.494) 216.755,-155.956 ccw(c216.755,-155.418) R225.2@217.135,-155.798
PT100_A11: R198.2 R246.1 U54.33 | length 26
  Top Layer w0.254: U54.33@205.303,-151.735 205.303,-156.484 213.385,-164.567 215.163,-164.567 215.515,-164.215 v1(215.515,-163.58) ; v1@215.425,-163.67 cw(c215.208,-163.887) 215.515,-163.887 cw(c215.822,-163.887) v1@215.605,-163.67
  Bottom Layer w0.254: R246.1@215.357,-162.132 cw(c214.977,-162.513) 215.515,-162.513 cw(c216.053,-162.513) R246.1@215.673,-162.132 ; v1@215.425,-163.49 ccw(c215.208,-163.273) 215.515,-163.273 ccw(c215.822,-163.273) v1@215.605,-163.49 ; v1(215.515,-163.58) R246.1@215.515,-161.9 R198.2@217.217,-161.9 ; R246.1@215.673,-162.057 cw(c216.053,-162.438) 216.053,-161.9 cw(c216.053,-161.361) R246.1@215.673,-161.742 ; 216.643,-161.9 ccw(c216.643,-161.275) R198.2@217.085,-161.717 ; 216.765,-161.9 cw(c216.765,-162.351) R198.2@217.085,-162.032
PT100_A12: R202.1 R210.2 U4.3 | length 20.9
  Top Layer w0.254: U4.3@205.295,-170.616 205.295,-169.33 205.74,-168.885 206.324,-168.885 209.479,-168.885 211.257,-167.107 215.544,-167.107 216.285,-167.847 v1(217.242,-167.847) ; v1@217.152,-167.937 ccw(c216.936,-168.154) 216.936,-167.847 ccw(c216.936,-167.541) v1@217.152,-167.757
  Bottom Layer w0.254: R202.1@215.515,-168.91 216.433,-168.91 R210.2@217.242,-168.91 v1(217.242,-167.847) v1@217.242,-167.72 ; R202.1@215.673,-169.068 cw(c216.053,-169.448) 216.053,-168.91 cw(c216.053,-168.372) R202.1@215.673,-168.752 ; R210.2@217.085,-169.068 ccw(c216.704,-169.448) 216.704,-168.91 ccw(c216.704,-168.372) R210.2@217.085,-168.752 ; R210.2@217.085,-168.677 ccw(c216.704,-168.297) 217.242,-168.297 ccw(c217.781,-168.297) R210.2@217.4,-168.677 ; v1@217.152,-167.937 cw(c216.936,-168.154) 217.242,-168.154 cw(c217.549,-168.154) v1@217.332,-167.937
PT100_A13: R214.1 R222.2 U4.45 | length 16.7
  Top Layer w0.254: U4.45@206.995,-172.816 208.16,-172.816 211.626,-176.282 214.151,-178.807 v1(216.306,-178.807) ; v1@216.217,-178.897 ccw(c216,-179.114) 216,-178.807 ccw(c216,-178.501) v1@216.217,-178.717
  Bottom Layer w0.254: R214.1@215.515,-178.807 v1(216.306,-178.807) R222.2@217.242,-178.807 ; R214.1@215.673,-178.965 cw(c216.053,-179.346) 216.053,-178.807 cw(c216.053,-178.269) R214.1@215.673,-178.65 ; v1@216.217,-178.897 ccw(c216,-179.114) 216,-178.807 ccw(c216,-178.501) v1@216.217,-178.717 ; v1@216.396,-178.897 cw(c216.613,-179.114) 216.613,-178.807 cw(c216.613,-178.501) v1@216.396,-178.717 ; R222.2@217.085,-178.965 ccw(c216.704,-179.346) 216.704,-178.807 ccw(c216.704,-178.269) R222.2@217.085,-178.65
PT100_B1: P4.2 P5.31 P5.33 R39.1 R193.1 U54.4 | length 40.1
  Top Layer w0.254: U54.4@205.303,-144.835 205.303,-144.023 207.112,-142.215 213.131,-142.215 214.782,-140.564 214.782,-138.758 R193.1@215.542,-137.998 ; R193.1@215.384,-137.766 ccw(c214.936,-137.317) 215.57,-137.317 ; R39.1@215.412,-136.631 cw(c215.031,-137.011) 215.57,-137.011 cw(c216.108,-137.011) R39.1@215.727,-136.631 ; 215.57,-137.452 ccw(c216.013,-137.452) R193.1@215.699,-137.766 ; R39.1@215.57,-136.398 215.57,-137.97 R193.1@215.542,-137.998 ; R193.1@215.699,-138.156 cw(c216.08,-138.537) 216.08,-137.998 cw(c216.08,-137.46) R193.1@215.699,-137.841 ; P4.2@222.174,-133.934 223.672,-135.433 223.672,-135.611 ; P5.31@230.53,-139.421 P5.33@230.53,-136.881 229.26,-135.611 223.672,-135.611 ; R193.1@215.542,-137.998 221.285,-137.998 223.672,-135.611
PT100_B2: P5.25 P5.27 R205.1 U54.48 | length 30.6
  Top Layer w0.254: U54.48@207.503,-145.535 208.922,-145.535 210.337,-144.12 212.623,-144.12 215.036,-144.12 215.542,-144.625 R205.1@215.542,-145.644 215.567,-145.618 224.206,-145.618 226.593,-143.231 229.26,-143.231 P5.27@230.53,-144.501 P5.25@230.53,-147.041 ; R205.1@215.384,-145.411 ccw(c215.003,-145.03) 215.542,-145.03 ccw(c216.08,-145.03) R205.1@215.699,-145.411 ; R205.1@215.699,-145.801 cw(c216.141,-146.243) 216.141,-145.618 ; R205.1@215.699,-145.486 ccw(c216.019,-145.167) 216.019,-145.618
PT100_B3: P5.20 P5.22 R217.1 U54.40 | length 27.7
  Top Layer w0.254: U54.40@207.503,-149.535 210.8,-149.535 211.417,-150.152 212.014,-150.749 v1(216.814,-150.749) ; v1@216.725,-150.839 ccw(c216.508,-151.056) 216.508,-150.749 ccw(c216.508,-150.442) v1@216.725,-150.659
  Bottom Layer w0.254: R217.1@215.515,-150.749 v1(216.814,-150.749) 226.619,-150.749 P5.22@227.99,-152.121 P5.20@227.99,-154.661 ; R217.1@215.673,-150.907 cw(c216.053,-151.287) 216.053,-150.749 cw(c216.053,-150.211) R217.1@215.673,-150.591 ; v1@216.725,-150.839 ccw(c216.508,-151.056) 216.508,-150.749 ccw(c216.508,-150.442) v1@216.725,-150.659 ; v1@216.904,-150.839 cw(c217.121,-151.056) 217.121,-150.749 cw(c217.121,-150.442) v1@216.904,-150.659
PT100_B4: P5.13 P5.15 R195.1 U54.36 | length 35.7
  Top Layer w0.254: U54.36@206.803,-151.735 206.803,-154.682 210.337,-158.217 214.147,-158.217 215.542,-159.611 R195.1@215.542,-160.858 223.825,-160.858 226.212,-158.471 229.26,-158.471 P5.15@230.53,-159.741 P5.13@230.53,-162.281 ; R195.1@215.384,-160.626 ccw(c215.003,-160.245) 215.542,-160.245 ccw(c216.08,-160.245) R195.1@215.699,-160.626 ; R195.1@215.699,-161.016 cw(c216.08,-161.397) 216.08,-160.858 cw(c216.08,-160.32) R195.1@215.699,-160.701
PT100_B5: P5.7 P5.9 R207.1 U4.2 | length 33.6
  Top Layer w0.254: U4.2@205.795,-170.616 205.795,-169.648 206.162,-169.281 209.738,-169.281 211.531,-167.488 214.909,-167.488 215.542,-168.12 R207.1@215.542,-168.859 ; R207.1@215.384,-168.627 ccw(c215.003,-168.246) 215.542,-168.246 ccw(c216.08,-168.246) R207.1@215.699,-168.627 ; R207.1@215.546,-168.863 R207.1@215.542,-168.859 ; R207.1@215.699,-169.017 cw(c216.08,-169.398) 216.08,-168.859 cw(c216.08,-168.321) R207.1@215.699,-168.702 ; P5.7@230.53,-169.901 P5.9@230.53,-167.361 229.133,-165.964 227.101,-165.964 224.206,-168.859 R207.1@215.542,-168.859
PT100_B6: P5.1 P5.3 R219.1 U4.48 | length 29.7
  Top Layer w0.254: U4.48@206.995,-171.316 211.372,-171.316 212.014,-171.958 214.63,-171.958 215.542,-172.87 R219.1@215.542,-173.558 226.06,-173.558 226.339,-173.838 229.387,-173.838 P5.3@230.53,-174.981 P5.1@230.53,-177.521 ; R219.1@215.384,-173.326 ccw(c215.003,-172.945) 215.542,-172.945 ccw(c216.08,-172.945) R219.1@215.699,-173.326 ; R219.1@215.699,-173.716 cw(c216.08,-174.097) 216.08,-173.558 cw(c216.08,-173.02) R219.1@215.699,-173.401
PT100_B8: P5.32 P5.34 R197.1 U54.2 | length 30.2
  Top Layer w0.254: U54.2@206.303,-144.835 206.303,-144.42 207.493,-143.231 211.353,-143.231 214.909,-143.231 v1(216.433,-141.707) ; U54.2@206.316,-144.55 cw(c206.661,-144.55) 206.417,-144.306 ; v1@216.306,-141.707 cw(c216,-141.707) 216.217,-141.923 cw(c216.433,-142.14) v1@216.433,-141.834
  Bottom Layer w0.254: R197.1@215.515,-141.707 v1(216.433,-141.707) 224.434,-141.707 226.72,-139.421 P5.32@227.99,-139.421 P5.34@227.99,-136.881 ; R197.1@215.673,-141.864 cw(c216.053,-142.245) 216.053,-141.707 cw(c216.053,-141.168) R197.1@215.673,-141.549 ; v1@216.344,-141.796 ccw(c216.127,-142.013) 216.127,-141.707 ccw(c216.127,-141.4) v1@216.344,-141.617 ; v1@216.523,-141.796 cw(c216.74,-142.013) 216.74,-141.707 cw(c216.74,-141.4) v1@216.523,-141.617
PT100_B9: P5.26 P5.28 R209.1 U54.46 | length 27.5
  Top Layer w0.254: U54.46@207.503,-146.535 209.573,-146.535 210.718,-145.39 v1(212.75,-145.39) ; v1@212.661,-145.479 ccw(c212.444,-145.696) 212.444,-145.39 ccw(c212.444,-145.083) v1@212.661,-145.3
  Bottom Layer w0.254: v1(212.75,-145.39) 213.004,-145.136 215.29,-145.136 215.515,-145.36 R209.1@215.515,-146.253 216.56,-146.253 224.841,-146.253 226.593,-144.501 P5.28@227.99,-144.501 P5.26@227.99,-147.041 ; R209.1@215.357,-146.021 ccw(c214.977,-145.64) 215.515,-145.64 ccw(c216.053,-145.64) R209.1@215.673,-146.021 ; R209.1@215.673,-146.411 cw(c216.053,-146.792) 216.053,-146.253 cw(c216.053,-145.715) R209.1@215.673,-146.096
PT100_B10: P5.19 P5.21 R221.1 U54.38 | length 31.2
  Top Layer w0.254: U54.38@207.503,-150.535 210.066,-150.535 211.295,-151.765 214.173,-151.765 215.542,-153.134 R221.1@215.542,-154.153 223.418,-154.153 226.72,-150.851 229.26,-150.851 P5.21@230.53,-152.121 P5.19@230.53,-154.661 ; R221.1@215.384,-153.92 ccw(c215.003,-153.539) 215.542,-153.539 ccw(c216.08,-153.539) R221.1@215.699,-153.92 ; R221.1@215.699,-154.31 cw(c216.08,-154.691) 216.08,-154.153 cw(c216.08,-153.614) R221.1@215.699,-153.995
PT100_B11: P5.14 P5.16 R191.1 U54.34 | length 38.4
  Top Layer w0.254: U54.34@205.803,-151.735 205.803,-155.968 213.766,-163.932 v1(214.782,-163.932) ; v1@214.693,-164.021 ccw(c214.476,-164.238) 214.476,-163.932 ccw(c214.476,-163.625) v1@214.693,-163.842
  Bottom Layer w0.254: v1@214.693,-163.842 ccw(c214.476,-163.625) 214.782,-163.625 ccw(c215.089,-163.625) v1@214.872,-163.842 ; v1(214.782,-163.932) 214.782,-160.956 R191.1@215.515,-160.223 216.433,-160.223 216.916,-159.741 P5.16@227.99,-159.741 P5.14@227.99,-162.281 ; 215.006,-160.732 cw(c215.515,-161.241) R191.1@215.515,-160.521 ; R191.1@215.187,-160.551 ccw(c214.935,-160.298) R191.1@215.292,-160.298 ; R191.1@215.673,-160.381 cw(c216.053,-160.762) 216.053,-160.223 cw(c216.053,-159.685) R191.1@215.673,-160.066
PT100_B12: P5.8 P5.10 R203.1 U4.4 | length 32.1
  Top Layer w0.254: U4.4@204.795,-170.616 204.795,-169.22 205.511,-168.504 209.321,-168.504 211.226,-166.599 215.773,-166.599 v1(216.433,-167.259) ; v1@216.306,-167.259 ccw(c216,-167.259) 216.217,-167.042 ccw(c216.433,-166.825) v1@216.433,-167.132
  Bottom Layer w0.254: R203.1@215.515,-167.259 v1(216.433,-167.259) 226.339,-167.259 ; R203.1@215.673,-167.417 cw(c216.053,-167.797) 216.053,-167.259 cw(c216.053,-166.721) R203.1@215.673,-167.101 ; v1@216.344,-167.349 ccw(c216.127,-167.566) 216.127,-167.259 ccw(c216.127,-166.952) v1@216.344,-167.169 ; v1@216.523,-167.349 cw(c216.74,-167.566) 216.74,-167.259 cw(c216.74,-166.952) v1@216.523,-167.169 ; 226.695,-167.259 226.339,-167.259 ; P5.8@227.99,-169.901 P5.10@227.99,-167.361 227.889,-167.259 226.339,-167.259
PT100_B13: P5.2 P5.4 R215.1 U4.46 | length 29.5
  Top Layer w0.254: U4.46@206.995,-172.316 208.486,-172.316 213.258,-177.089 v1(216.306,-177.089) ; v1@216.217,-177.179 ccw(c216,-177.395) 216,-177.089 ccw(c216,-176.782) v1@216.217,-176.999
  Bottom Layer w0.254: R215.1@215.515,-177.089 v1(216.306,-177.089) 223.977,-177.089 226.085,-174.981 P5.4@227.99,-174.981 P5.2@227.99,-177.521 ; R215.1@215.673,-177.246 cw(c216.053,-177.627) 216.053,-177.089 cw(c216.053,-176.55) R215.1@215.673,-176.931 ; v1@216.217,-177.179 ccw(c216,-177.395) 216,-177.089 ccw(c216,-176.782) v1@216.217,-176.999 ; v1@216.396,-177.179 cw(c216.613,-177.395) 216.613,-177.089 cw(c216.613,-176.782) v1@216.396,-176.999
RE_IO2: U44.3
RELAY_A1: K1.1 P20.1 | length 23.7
  GND w0.762: K1.1@212.019,-265.567 216.538,-261.048 229.288,-261.048 P20.1@230.546,-262.306 ; K1.1@212.019,-265.198 ccw(c212.019,-264.307) 212.649,-264.937 ccw(c213.279,-265.567) K1.1@212.388,-265.567 ; P20.1@230.177,-262.306 ccw(c229.287,-262.306) 229.916,-261.676 ccw(c230.546,-261.046) P20.1@230.546,-261.937
RELAY_A2: K4.1 P20.5 | length 54.1
  GND w0.762: K4.1@186.362,-265.306 ccw(c185.732,-264.676) 186.623,-264.676 ccw(c187.514,-264.676) K4.1@186.884,-265.306 ; K4.1@186.623,-265.567 186.623,-260.696 191.352,-255.968 229.288,-255.968 P20.5@230.546,-257.226 ; P20.5@230.177,-257.226 ccw(c229.287,-257.226) 229.916,-256.596 ccw(c230.546,-255.966) P20.5@230.546,-256.857
RELAY_A3: K7.1 P20.3 | length 39.4
  GND w0.762: K7.1@199.06,-265.306 ccw(c198.43,-264.676) 199.321,-264.676 ccw(c200.212,-264.676) K7.1@199.582,-265.306 ; K7.1@199.321,-265.567 199.321,-262.349 203.163,-258.508 229.288,-258.508 P20.3@230.546,-259.766 ; P20.3@230.177,-259.766 ccw(c229.287,-259.766) 229.916,-259.136 ccw(c230.546,-258.506) P20.3@230.546,-259.397
RELAY_A4: K10.1 P20.7 | length 73.1
  Top Layer w0.762: K10.1@173.665,-265.828 cw(c173.035,-266.458) 173.926,-266.458 cw(c174.816,-266.458) K10.1@174.187,-265.828 ; K10.1@173.926,-265.567 173.926,-267.347 177.571,-270.993 214.02,-270.993 223.977,-261.036 223.977,-256.692 227.242,-253.428 229.288,-253.428 P20.7@230.546,-254.686 ; P20.7@230.177,-254.686 ccw(c229.287,-254.686) 229.916,-254.056 ccw(c230.546,-253.426) P20.7@230.546,-254.317